# EAGLE board resonate (EAGLE 6.5.0)
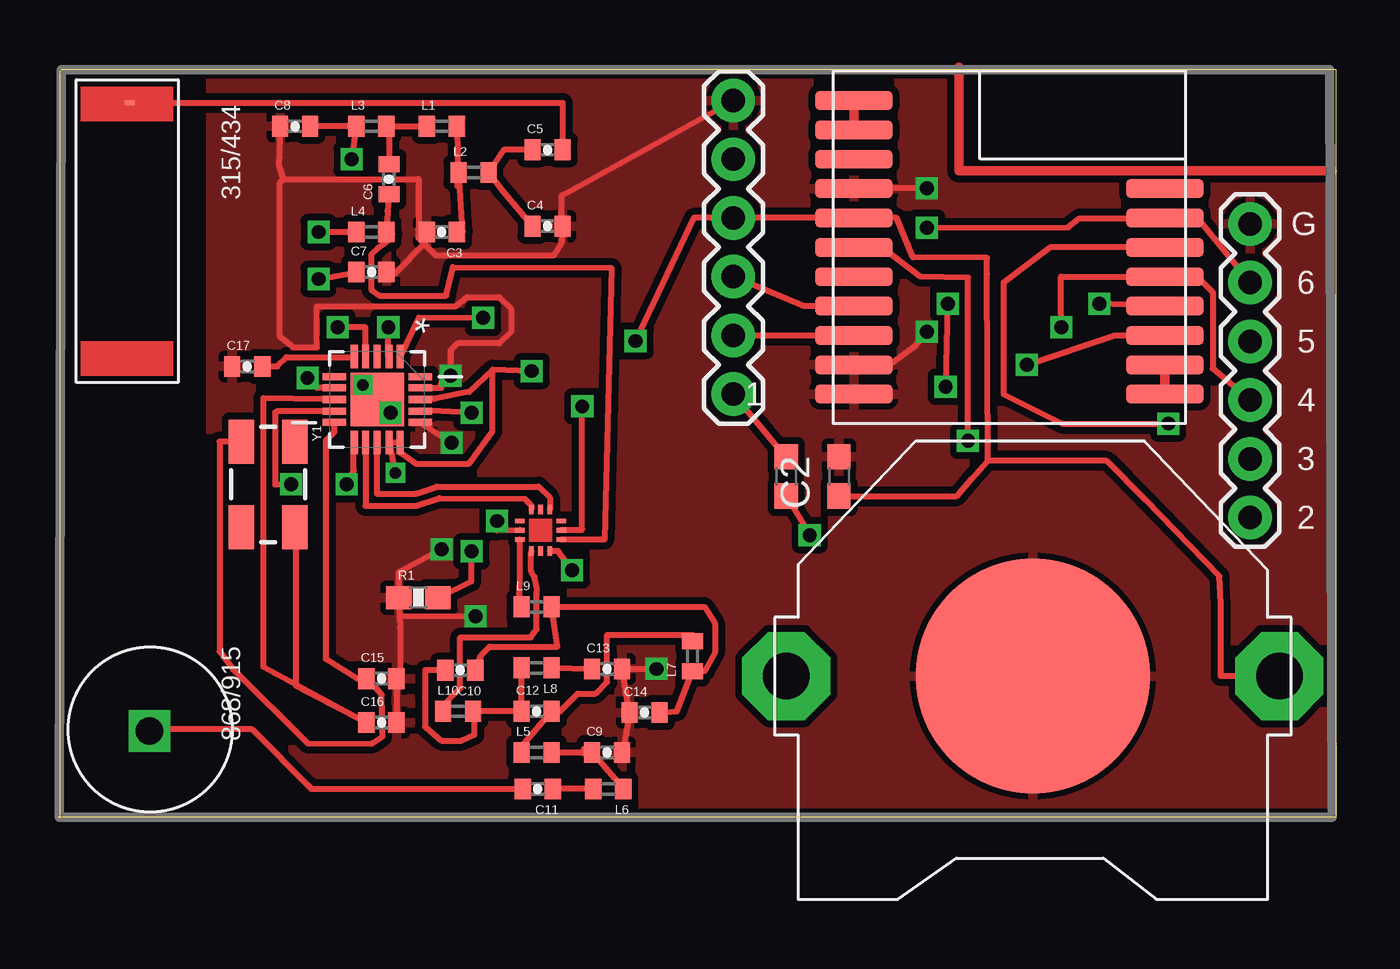
[diagram p0: board, top side]
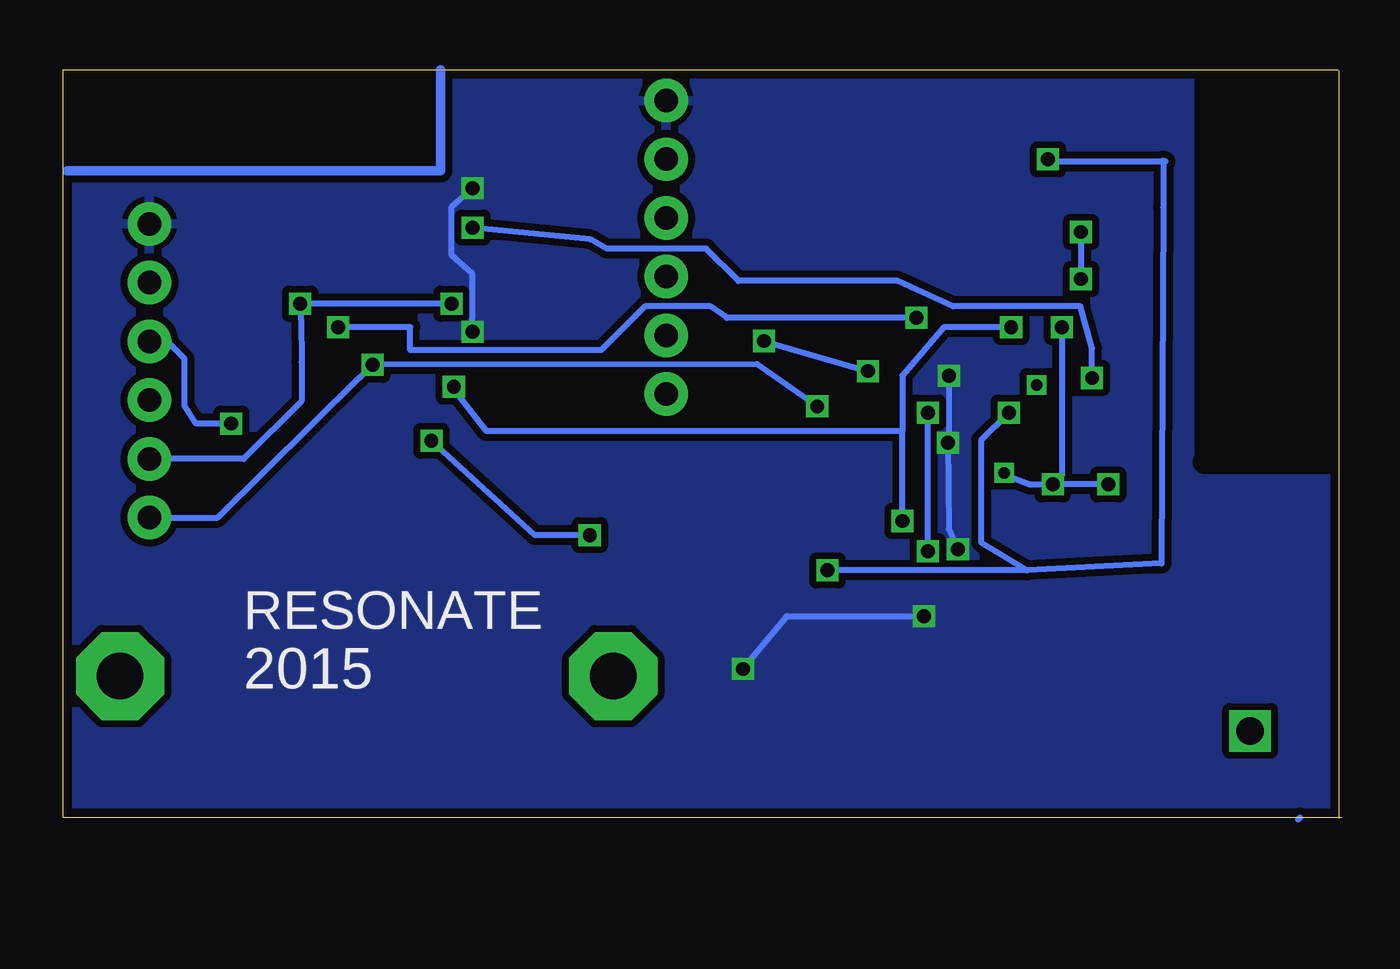
[diagram p1: board, bottom side, seen from below]

Size 55.31 x 32.38 mm. Coordinates in mm from the lower left corner, seen from the top.
Outline: 0.15,32.38 55.31,32.38 55.31,0.05 0,0.05
Outline: 0.11,0 0.11,32.33
Copper layers (1*16): Top 0.0356mm / dielectric 1.5011mm / Bottom 0.0356mm
Design rules "LaenPCBOrder": minimum track width 6mil, minimum drill 13mil, track to track 6mil, track to pad 6mil, pad to pad 6mil, via to via 6mil, smd to smd 6mil, copper to edge 15mil, drill to drill 6mil, minimum pad ring 7mil, minimum via ring 7mil, stop-mask expansion 3mil, vias tented up to drill 0mil, thermal gap 10mil
tRestrict: 4 lines
bRestrict: 4 lines

## Footprints (pad centres in the part's own frame; a part is rotated, then mirrored left to right if it is on the bottom)
C0603 = smd 1.1 x 1: 1 -0.85,0; 2 0.85,0
0402-CAP = smd 0.7 x 0.9: 1 -0.65,0; 2 0.65,0
1X06 = drill 1.016 pad 1.88: CTS 10.16,0; DTR 0,0; GND 12.7,0; RXI 2.54,0; TXO 5.08,0; VCC 7.62,0
C0402 = smd 0.7 x 0.9: 1 -0.65,0; 2 0.65,0
0603-RES = smd 1.1 x 1: 1 -0.85,0; 2 0.85,0
QFN50P400X400X90-21N = smd 1.016 x 0.305: 1 -1.854,0.991; 2 -1.854,0.508; 3 -1.854,0; 4 -1.854,-0.508; 5 -1.854,-0.991; 11 1.854,-0.991; 12 1.854,-0.508; 13 1.854,0; 14 1.854,0.508; 15 1.854,0.991 | smd 0.305 x 1.016: 6 -0.991,-1.854; 7 -0.508,-1.854; 8 0,-1.854; 9 0.508,-1.854; 10 0.991,-1.854; 16 0.991,1.854; 17 0.508,1.854; 18 0,1.854; 19 -0.508,1.854; 20 -0.991,1.854 | smd 2.311 x 2.311: 21 0,0
RFD21733 = smd 3.353 x 0.813: P$1 -6.731,6.35; P$2 -6.731,5.08; P$3 -6.731,3.81; P$4 -6.731,2.54; P$5 -6.731,1.27; P$6 -6.731,0; P$7 -6.731,-1.27; P$8 -6.731,-2.54; P$9 6.731,-6.35; P$10 6.731,-5.08; P$11 6.731,-3.81; P$12 6.731,-2.54; P$13 6.731,-1.27; P$14 6.731,0; P$15 6.731,1.27; P$16 6.731,2.54; P$17 6.731,3.81; P$18 6.731,5.08; P$19 6.731,6.35
CR2032-THRU = drill 2 pad 3.81 octagon: +1 -10.668,0; +2 10.668,0 | smd 10.16 x 10.16: - 0,0
ANT-868-JJB-ST = drill 1.2 square: P$2 0.762,-0.762
SKY13354-368LF = smd 0.406 x 0.203: N/C -0.9,0; N/C3 0.9,0; RF1B -0.9,0.4; RF2A -0.9,-0.4; RFCA 0.9,0.4; RFCB 0.9,-0.4 | smd 0.203 x 0.406: N/C2 0.4,-0.9; N/C4 0.4,0.9; RF1A -0.4,0.9; RF2B -0.4,-0.9; V1 0,-0.9; V2 0,0.9
ANT1204F002R0433A = smd 0.203 x 0.406: P$1 0.7,-1.87
CRYSTAL-SMD-5X3 = smd 1.9 x 1.1: 1 -1.85,-1.15; 2 1.85,-1.15; 3 1.85,1.15; 4 -1.85,1.15

## Placement (x,y rotation side)
C1  10uf  [C0603]  31.51,14.79 90 top
C2  10uf  [C0603]  33.8,14.79 270 top
C3  8.2 pF  [0402-CAP]  16.61,25.36 180 top
C4  5.6 pF  [0402-CAP]  21.19,25.61 0 top
C5  220 pF  [0402-CAP]  21.19,28.92 0 top
C6  3.9 pF  [0402-CAP]  14.33,27.65 90 top
C7  220 pF  [0402-CAP]  13.57,23.63 0 top
C8  3.9 pF  [0402-CAP]  10.26,29.93 0 top
C9  3.3 pF  [0402-CAP]  23.76,2.86 0 top
C10  1.0 pF  [0402-CAP]  17.41,6.41 180 top
C11  12 pf  [0402-CAP]  20.76,1.28 180 top
C12  1.5pF  [0402-CAP]  20.72,4.63 0 top
C13  100pF  [0402-CAP]  23.76,6.47 0 top
C14  1.5pf  [0402-CAP]  25.38,4.58 0 top
C15  27 pF  [0402-CAP]  14,6.05 0 top
C16  27 pF  [0402-CAP]  14,4.15 0 top
C17  100 nF  [0402-CAP]  8.2,19.55 0 top
JP1  Left Breakout  [1X06]  51.58,25.71 270 top
JP2  Right Breakout  [1X06]  29.23,18.35 90 top
L1  22nH  [C0402]  16.61,29.93 0 top
L2  27 nH  [C0402]  17.99,27.94 0 top
L3  27 nH  [C0402]  13.57,29.93 0 top
L4  27 nH  [C0402]  13.57,25.36 0 top
L5  12 nH  [C0402]  20.72,2.86 0 top
L6  12 nH  [C0402]  23.82,1.28 180 top
L7  18 nH  [C0402]  27.46,7.01 90 top
L8  18 nH  [C0402]  20.72,6.51 180 top
L9  12 nH  [C0402]  20.72,9.15 0 top
L10  12 nH  [C0402]  17.31,4.63 0 top
R1  56 k  [0603-RES]  15.6,9.55 0 top
U1  CC1101RTK  [QFN50P400X400X90-21N]  13.82,18.12 270 top
U$1  RFD22301  [RFD21733]  41.17,24.7 180 top
U$2  3V  [CR2032-THRU]  42.18,6.16 180 top
U$3  ANT-868-JJB-ST  [ANT-868-JJB-ST]  3.2,4.55 0 top
U$5  SKY13354-368LF  [SKY13354-368LF]  20.89,12.46 90 top
U$6  ANT1204F002R0433A  [ANT1204F002R0433A]  5,31.65 270 top
Y1  26 mHz  [CRYSTAL-SMD-5X3]  9.1,14.45 270 top

## Library data of the parts
C1 C2 U$2 = adafruit
C3-C17 = SparkFun-Capacitors
JP1 JP2 = SparkFun-Connectors
L1-L10 R1 = SparkFun-Passives
U1 = Texas Instruments_By_element14_Batch_1; MPN: CC1101RTK; OC_FARNELL: 1555264; OC_NEWARK: 50M8833; PACKAGE: QFN-20; SUPPLIER: Texas Instruments
U$1 = RFD22301-11.25.13
U$3 U$6 = antenna
U$5 = skyworks
Y1 = SparkFun-FreqCtrl

## Nets
GND: C2.1 C3.2 C4.2 C7.2 C8.1 C9.2 C13.2 C14.1 C15.2 C16.2 C17.1 JP1.DTR JP2.GND R1.1 U1.16 U1.19 U$1.P$12 U$1.P$18 U$1.P$19 U$2.-
N$1: U$2.+2
N$4: U$1.P$9 U$1.P$10
N$5: U$1.P$1 U$1.P$2
N$6: C1.1 U$1.P$14
N$7: C1.2 JP2.DTR
N$8: JP2.RXI U$1.P$17
N$9: JP2.TXO U$1.P$16
N$10: C3.1 L1.2 L2.1
N$11: C4.1 C5.1 L2.2
N$12: C6.1 L4.2 U$5.RF2B
N$13: C7.1 L4.1
N$14: C8.2 L3.1 U1.21 U$5.RF2A
N$15: C9.1 L5.2 L6.1
N$16: C6.2 L1.1 L3.2
N$17: C11.1 L6.2
N$18: C10.2 C12.1 L8.2 L10.2
N$19: C13.1 L8.1
N$20: C10.1 C14.2 L7.1 L9.2
N$21: C12.2 L5.1 L7.2
N$22: C5.2 U$6.P$1
N$23: C11.2 U$3.P$2
N$24: U1.12 U$5.RFCA
N$25: U1.13 U$5.RFCB
N$26: C15.1 U1.10 Y1.1
N$28: L9.1 U$5.RF1A
N$29: L10.1 U$5.RF1B
N$30: C16.1 U1.8 Y1.3
N$31: R1.2 U1.17
N$32: U1.20
N$34: C17.2 U1.5
P2: JP1.GND U$1.P$3 U$5.V1
P3: JP1.CTS U1.2 U$1.P$4 U$5.V2
P4: JP1.VCC U1.1 U$1.P$5
P5: JP1.TXO U$1.P$6
P6: JP1.RXI U1.7 U$1.P$7
VCC: C2.2 JP2.VCC U1.4 U1.9 U1.11 U1.14 U1.15 U1.18 U$1.P$13 U$2.+1

## Tracks (layer width: path | path; a pad name or v marks a point on that pad's centre or on a via)
GND  (via drill 0.6)
  Top 0.254: 14.58,23.58 15.85,24.85 | C8.1 9.56,28.24 9.76,27.65 | 9.76,27.65 15.6,27.65 15.6,25.48 C3.2 15.6,25.36 15.6,25.11 15.85,24.85 | 15.85,24.85 16.36,24.34 21.44,24.34 21.79,24.89 C4.2 21.8,25.92 21.8,26.94 JP2.GND | U$1.P$18 34.53,19.62 34.6,19.55 35.9,19.55 37.1,20.45 v37.6,21.05 | v37.6,27.25 U$1.P$12 | C9.2 24.48,3.04 C14.1 24.66,4.76 C13.2 v25.9,6.47 | C16.2 C15.2 14.8,5.95 14.8,8.25 14.78,8.73 | 14.78,8.73 R1.1 14.75,10.65 v16.6,11.65 | U1.16 v17.04,16.25 | 9.76,27.65 9.6,27.49 9.6,20.85 10.18,20.37 11.2,20.37 11.2,22.15 17.2,22.15 17.7,22.55 19.1,22.55 19.6,22.05 19.6,21.05 19.1,20.55 17.3,20.55 17,20.25 v17,19.15 16.6,18.85 16.6,18.63 U1.19 | v18.08,8.75 14.78,8.73
  Top 0.305: C7.2 14.58,23.58
  Top 0.406: U$1.P$12
  Bottom 0.254: v37.6,21.05 37.6,23.55 38.5,24.35 38.5,26.45 v37.6,27.25 | v16.6,11.65 17,12.53 v17.04,16.25 17,16.59 v17,19.15 | v25.9,6.47 24,8.75 v18.08,8.75
  pour Top (isolate 0.305): 0.15,32.39 55.24,32.39 55.14,0.06 0.05,0.06
  pour Bottom (isolate 0.305): 0.15,32.39 55.24,32.39 55.14,0.06 0.15,0.06
N$2
  Top 0.406: 38.98,32.49 38.98,28 55.14,28
N$3
  Bottom 0.406: 38.98,32.39 38.98,28 55.14,28
N$4
  Top 0.406: U$1.P$9 U$1.P$10
N$5
  Top 0.406: 48.02,19.62 U$1.P$2 U$1.P$1
N$6  (via drill 0.6)
  Top 0.254: U$1.P$14 35.65,24.7 37.3,23.45 39.38,23.4 v39.38,16.33 | C1.1 v32.53,12.25
  Bottom 0.254: v32.53,12.25 34.9,12.25 v39.38,16.33
N$7
  Top 0.254: C1.2 31.26,15.9 JP2.DTR
N$8
  Top 0.254: JP2.RXI U$1.P$17
N$9
  Top 0.254: U$1.P$16 32.28,22.16 JP2.TXO
N$10
  Top 0.254: L1.2 17.31,27.36 | L2.1 17.49,25.38
  Top 0.305: 17.31,27.36 L2.1 | 17.49,25.38 C3.1
N$11
  Top 0.254: C4.1 19.27,27.12 L2.2 19.29,28.92 C5.1 20.42,28.92
N$12
  Top 0.254: C6.1 14.27,26.28 L4.2 14.47,25.28 14.23,24.94 13.82,24.64 13.56,24.39 13.56,22.87 13.92,22.61 16.8,22.61 17.1,23.85 23.95,23.81 23.65,12.06 21.89,12.06 U$5.RF2B
N$13  (via drill 0.6)
  Top 0.254: L4.1 v11.28,25.36 | v11.28,23.33 C7.1
  Bottom 0.254: v11.28,25.36 v11.28,23.33
N$14  (via drill 0.6)
  Top 0.254: C8.2 L3.1 v12.7,28.5 | v22.25,10.73 21.65,11.56 U$5.RF2A | U1.21 v14.4,17.55
  Bottom 0.254: v12.7,28.5 12.7,28.41 7.62,28.41 7.72,28.45 7.72,26.41 7.8,11.03 13.6,10.73 | 13.6,10.73 v22.25,10.73 | v14.4,17.55 15.6,16.35 15.6,11.95 13.6,10.73
N$15
  Top 0.254: L5.2 C9.1 | 22.8,2.95 23.05,2.95 L6.1
  Top 0.406: C9.1 22.8,2.86 22.8,2.95
N$16
  Top 0.254: L1.1 L3.2 14.33,29.93 C6.2
N$17
  Top 0.254: L6.2 C11.1
N$18
  Top 0.254: C10.2 15.89,6.41 15.89,5.65 15.88,5.24 15.88,3.97 16.59,3.36 17.47,3.36 18.02,3.62 18.02,4.64 L10.2 C12.1 L8.2
N$19
  Top 0.254: L8.1 C13.1
N$20
  Top 0.254: C14.2 26.78,4.63 L7.1 | 28,6.4 28.43,7.17 28.43,8.44 27.97,9.15 L9.2 21.62,7.43 18.68,7.43 18.31,7.06 C10.1
  Top 0.305: 28,6.4 L7.1
N$21
  Top 0.254: L5.1 19.84,2.86 C12.2 21.73,4.63 22.49,5.4 23.26,5.4 23.76,5.9 23.76,7.94 27.46,7.94 L7.2
N$22
  Top 0.254: U$6.P$1 21.84,30.95 C5.2
N$23
  Top 0.254: 10.8,1.45 10.97,1.28 | 10.97,1.28 C11.2 | 10.97,1.28 8.4,3.85 4.02,3.85 U$3.P$2
N$24
  Top 0.254: U1.12 13.31,13.52 15.5,13.52 16.5,13.85 20.19,13.82 20.49,13.52 U$5.RFCA
N$25
  Top 0.254: U1.13 13.8,16.26 13.8,14.05 15.5,14.05 16.4,14.35 20.8,14.35 21.29,13.86 U$5.RFCB
N$26
  Top 0.254: Y1.1 7,16.3 7,7.22 7.58,6.45 10.82,3.25 13.58,3.23 14.04,3.55 14.01,5.35 13.5,5.99 C15.1 12.94,6.05 11.6,6.89 11.6,16.35 11.97,16.71 U1.10
N$28
  Top 0.254: U$5.RF1A 19.99,10.55 19.95,9.71 19.95,9.34
  Top 0.305: 19.95,9.34 L9.1
N$29
  Top 0.254: 16.51,4.75 17.41,5.65 17.41,7.84 20.46,7.84 20.72,8.19 20.72,9.71 20.73,9.93 20.63,10.43 20.48,10.69 20.48,11.46 U$5.RF1B
  Top 0.305: L10.1 16.51,4.75
N$30
  Top 0.254: Y1.3 10.3,12.6 10.3,8.34 10.29,5.75 C16.1 8.9,6.55 8.9,18.19 11.46,18.15 11.97,18.15 U1.8
N$31  (via drill 0.6)
  Top 0.254: R1.2 17.9,10.25 v17.9,11.55 | v17.9,17.55 15.67,17.65 U1.17
  Bottom 0.254: v17.9,11.55 v17.9,17.55
N$33  (via drill 0.5)
  other vias: 13.2,18.75
N$34
  Top 0.254: 12.8,20.05 12.83,20.02 U1.5 12.8,19.95 9.9,19.95 9.5,19.55 C17.2
N$38
  Bottom 0.254: 1.9,-0.05 1.8,0.05
P2  (via drill 0.6)
  Top 0.254: v22.69,17.82 22.69,12.53 22.66,12.53 22.66,12.46 U$5.V1 | v41.93,19.62 45.74,20.89 U$1.P$3
  Bottom 0.254: v22.69,17.82 v22.7,17.82 25.3,19.65 v41.93,19.62 42.5,19.05 48.63,13.01 JP1.GND
P3  (via drill 0.6)
  Top 0.254: U$1.P$4 v45.06,22.26 | U$5.V2 19,12.45 v19,12.86 v19.01,12.86 | v38.41,18.67 v38.51,22.26 | U1.2 14.3,19.97 v14.3,21.25
  Bottom 0.254: v19.01,12.86 19.01,16.75 | 19.01,16.75 19.01,19.15 17.21,21.25 v14.3,21.25 | 19.01,16.75 37,16.75 38.49,18.65 v38.41,18.67 | v38.51,22.26 43.96,22.26 45,22.26 | 45,22.26 v45.06,22.26 | JP1.CTS 47.5,15.55 45,18.05 45,19.75 45.01,21.56 45.01,22.25 45,22.26
P4  (via drill 0.6)
  Top 0.254: 49.29,23.43 49.96,22.77 49.96,19.46 JP1.VCC | U1.1 15.62,21.67 v18.4,21.65 | v43.42,21.25 43.4,22.35 43.4,23.43 U$1.P$5
  Top 0.406: U$1.P$5 49.29,23.43
  Bottom 0.254: v18.4,21.65 26.6,21.65 27.3,22.15 30.14,22.15 31,21.29 32.04,20.25 40.3,20.25 40.3,21.25 v43.42,21.25
P5  (via drill 0.6)
  Top 0.254: U$1.P$6 42.94,24.7 40.91,23.17 40.91,18.35 43.45,17.08 v48.04,17.08
  Bottom 0.254: v48.04,17.08 49.55,17.08 50.06,17.84 50.06,19.87 50.82,20.63
  Bottom 0.406: 50.82,20.63 JP1.TXO
P6  (via drill 0.6)
  Top 0.254: 49.29,25.97 JP1.RXI | U1.7 11.22,18.63 v10.8,19.05 | v37.6,25.55 43.7,25.56 44.2,25.95 47.88,25.95 U$1.P$7
  Top 0.406: U$1.P$7 49.29,25.97
  Bottom 0.254: v10.8,19.05 10.8,20.35 11.3,22.15 16.8,22.15 19.2,23.25 26.1,23.25 27.5,24.65 31.8,24.65 32.5,25.05 v37.6,25.55
VCC  (via drill 0.5 pad 0.25, 0.6)
  Top 0.254: C2.2 38.89,13.94 39.5,14.65 40.24,15.47 | 40.24,15.47 40.2,23.55 40.2,24.25 37,24.27 36.3,25.95 36.28,25.97 U$1.P$13 JP2.VCC 27.52,25.97 v25,20.65 | U$2.+1 50.31,6.16 50.31,9.3 50.25,10.47 47.04,13.8 45.38,15.47 40.24,15.47 | v20.5,19.35 18.82,19.41 | 18.82,19.41 17.8,18.45 16.3,18.15 15.7,18.15 U1.18 | U1.9 9.46,17.61 9.4,17.55 9.4,14.45 v10.1,14.45 | v12.5,14.45 12.8,15.05 12.8,16.23 U1.11 | U1.4 13.31,21.24 v12.1,21.25 | 18.82,19.41 18.8,19.03 18.8,16.75 17.8,15.35 15.5,15.35 14.81,15.84 U1.15 U1.14 v14.6,14.95
  Bottom 0.254: v25,20.65 v20.5,19.35 | v10.1,14.45 v12.5,14.45 | v12.1,21.25 12.1,14.85 v12.5,14.45 | v14.6,14.95 14.6,14.88 14.63,14.88 13.5,14.45 v12.5,14.45

## Text on the board
tPlace: G | 6 | 5 | 1 | 4 | 3 | 2
bPlace: RESONATE | 2015
tNames: 315/434 | 868/915